# EAGLE board 8x8-LED-Matrix (EAGLE 5.11)
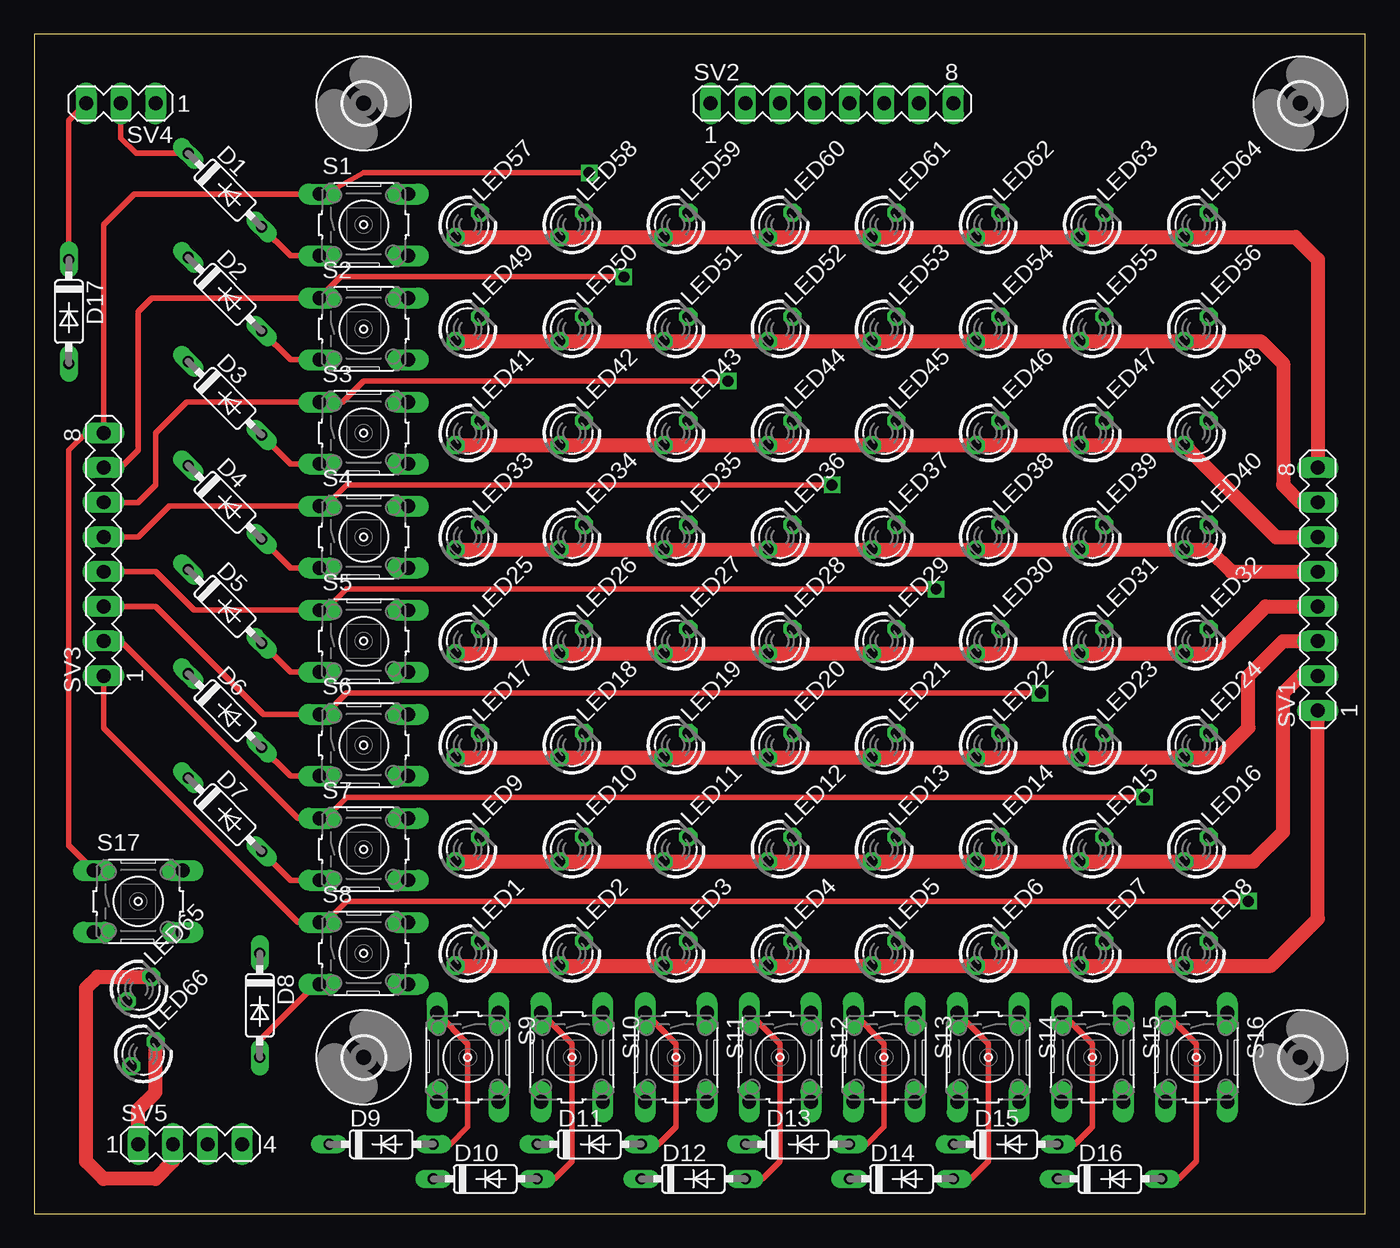
[diagram p0: board, top side]
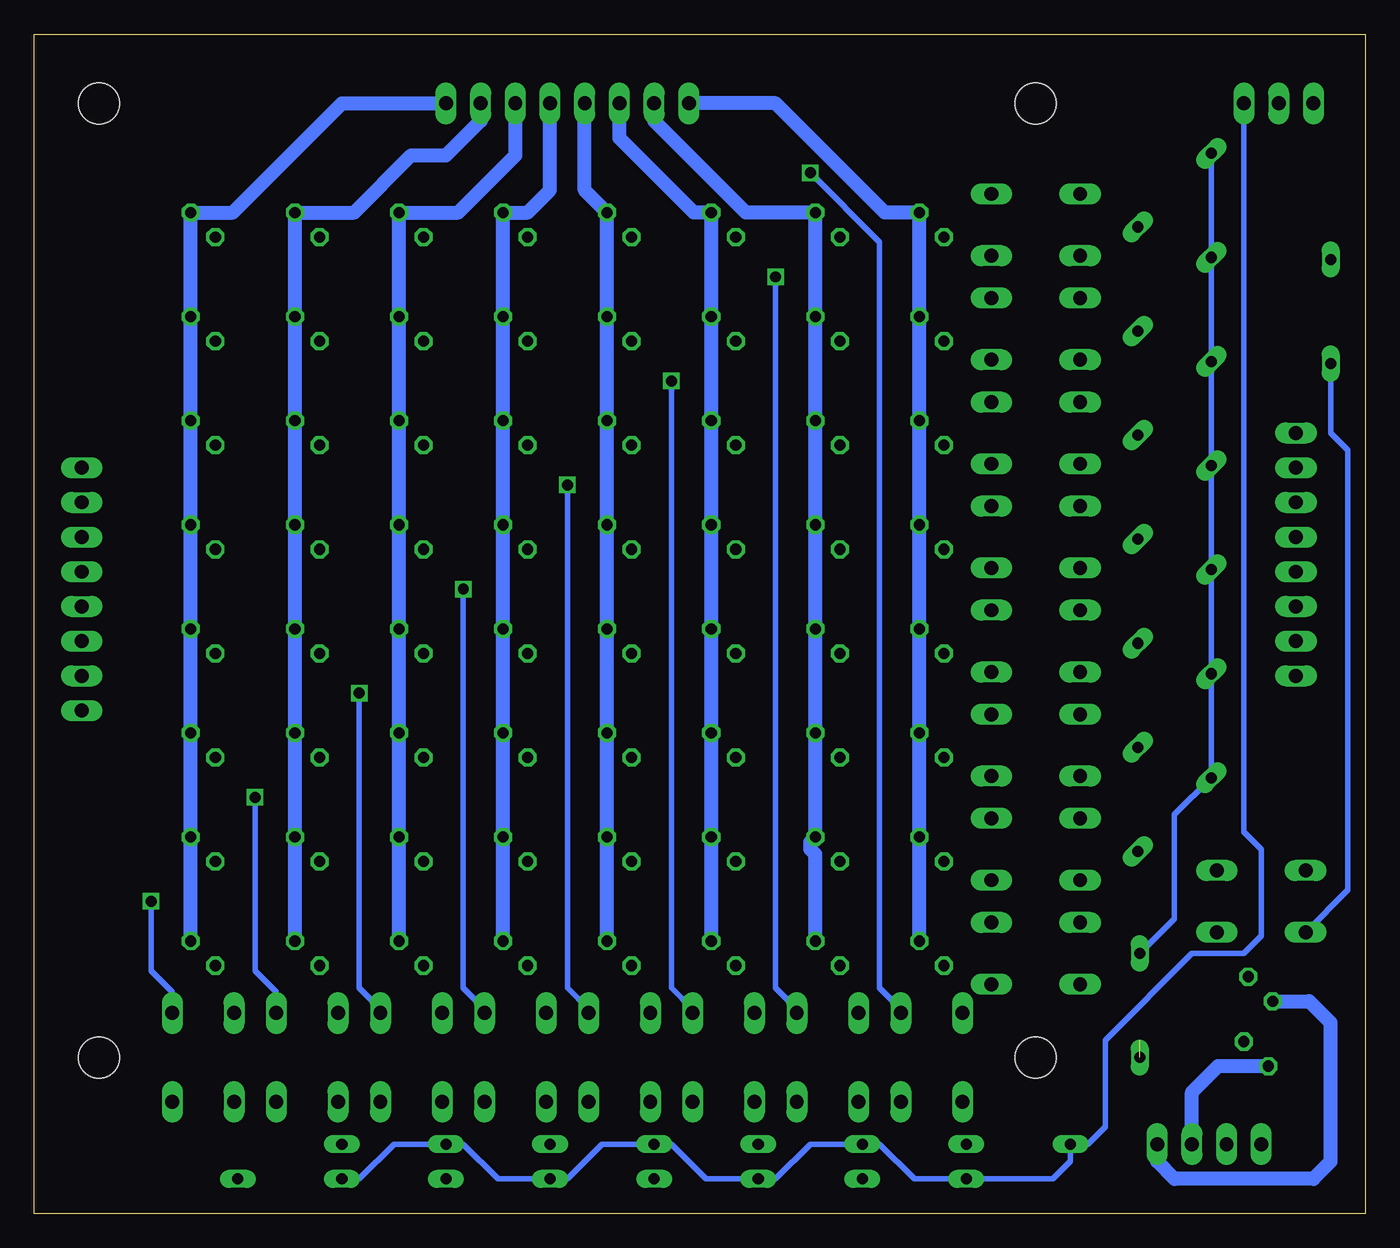
[diagram p1: board, bottom side, seen from below]

Size 97.46 x 86.35 mm. Coordinates in mm from the lower left corner, seen from the top.
Outline: 0,0 97.46,0 97.46,86.35 0,86.35 0,0
Copper layers (1*16): Top 0.035mm / dielectric 1.5mm / Bottom 0.035mm
Design rules "batchpcb": minimum track width 8mil, minimum drill 20mil, track to track 8mil, track to pad 8mil, pad to pad 8mil, via to via 8mil, smd to smd 8mil, copper to edge 40mil, drill to drill 8mil, minimum pad ring 10mil, minimum via ring 8mil, stop-mask expansion 4mil, vias tented up to drill 0mil, thermal gap 10mil

## Footprints (pad centres in the part's own frame; a part is rotated, then mirrored left to right if it is on the bottom)
DO35-7 = drill 0.813 long: A 3.81,0; C -3.81,0
LED3MM = drill 0.813 octagon: A -1.27,0; K 1.27,0
B3F-10XX = drill 1.016 long: 1 -3.251,2.261; 2 3.251,2.261; 3 -3.251,-2.261; 4 3.251,-2.261
MA08-1 = drill 1.016 long: 1 -8.89,0; 2 -6.35,0; 3 -3.81,0; 4 -1.27,0; 5 1.27,0; 6 3.81,0; 7 6.35,0; 8 8.89,0
MA03-1 = drill 1.016 long: 1 -2.54,0; 2 0,0; 3 2.54,0
MA04-1 = drill 1.016 long: 1 -3.81,0; 2 -1.27,0; 3 1.27,0; 4 3.81,0
3,0 = hole 3: 0,0

## Placement (x,y rotation side)
D1  1N4148DO35-7  [DO35-7]  13.97,74.93 315 top
D2  1N4148DO35-7  [DO35-7]  13.97,67.31 315 top
D3  1N4148DO35-7  [DO35-7]  13.97,59.69 315 top
D4  1N4148DO35-7  [DO35-7]  13.97,52.07 315 top
D5  1N4148DO35-7  [DO35-7]  13.97,44.45 315 top
D6  1N4148DO35-7  [DO35-7]  13.97,36.83 315 top
D7  1N4148DO35-7  [DO35-7]  13.97,29.21 315 top
D8  1N4148DO35-7  [DO35-7]  16.51,15.24 270 top
D9  1N4148DO35-7  [DO35-7]  25.4,5.08 0 top
D10  1N4148DO35-7  [DO35-7]  33.02,2.54 0 top
D11  1N4148DO35-7  [DO35-7]  40.64,5.08 0 top
D12  1N4148DO35-7  [DO35-7]  48.26,2.54 0 top
D13  1N4148DO35-7  [DO35-7]  55.88,5.08 0 top
D14  1N4148DO35-7  [DO35-7]  63.5,2.54 0 top
D15  1N4148DO35-7  [DO35-7]  71.12,5.08 0 top
D16  1N4148DO35-7  [DO35-7]  78.74,2.54 0 top
D17  1N4148DO35-7  [DO35-7]  2.54,66.04 270 top
LED1  TLLY4400  [LED3MM]  31.75,19.05 45 top
LED2  TLLY4400  [LED3MM]  39.37,19.05 45 top
LED3  TLLY4400  [LED3MM]  46.99,19.05 45 top
LED4  TLLY4400  [LED3MM]  54.61,19.05 45 top
LED5  TLLY4400  [LED3MM]  62.23,19.05 45 top
LED6  TLLY4400  [LED3MM]  69.85,19.05 45 top
LED7  TLLY4400  [LED3MM]  77.47,19.05 45 top
LED8  TLLY4400  [LED3MM]  85.09,19.05 45 top
LED9  TLLY4400  [LED3MM]  31.75,26.67 45 top
LED10  TLLY4400  [LED3MM]  39.37,26.67 45 top
LED11  TLLY4400  [LED3MM]  46.99,26.67 45 top
LED12  TLLY4400  [LED3MM]  54.61,26.67 45 top
LED13  TLLY4400  [LED3MM]  62.23,26.67 45 top
LED14  TLLY4400  [LED3MM]  69.85,26.67 45 top
LED15  TLLY4400  [LED3MM]  77.47,26.67 45 top
LED16  TLLY4400  [LED3MM]  85.09,26.67 45 top
LED17  TLLY4400  [LED3MM]  31.75,34.29 45 top
LED18  TLLY4400  [LED3MM]  39.37,34.29 45 top
LED19  TLLY4400  [LED3MM]  46.99,34.29 45 top
LED20  TLLY4400  [LED3MM]  54.61,34.29 45 top
LED21  TLLY4400  [LED3MM]  62.23,34.29 45 top
LED22  TLLY4400  [LED3MM]  69.85,34.29 45 top
LED23  TLLY4400  [LED3MM]  77.47,34.29 45 top
LED24  TLLY4400  [LED3MM]  85.09,34.29 45 top
LED25  TLLY4400  [LED3MM]  31.75,41.91 45 top
LED26  TLLY4400  [LED3MM]  39.37,41.91 45 top
LED27  TLLY4400  [LED3MM]  46.99,41.91 45 top
LED28  TLLY4400  [LED3MM]  54.61,41.91 45 top
LED29  TLLY4400  [LED3MM]  62.23,41.91 45 top
LED30  TLLY4400  [LED3MM]  69.85,41.91 45 top
LED31  TLLY4400  [LED3MM]  77.47,41.91 45 top
LED32  TLLY4400  [LED3MM]  85.09,41.91 45 top
LED33  TLLY4400  [LED3MM]  31.75,49.53 45 top
LED34  TLLY4400  [LED3MM]  39.37,49.53 45 top
LED35  TLLY4400  [LED3MM]  46.99,49.53 45 top
LED36  TLLY4400  [LED3MM]  54.61,49.53 45 top
LED37  TLLY4400  [LED3MM]  62.23,49.53 45 top
LED38  TLLY4400  [LED3MM]  69.85,49.53 45 top
LED39  TLLY4400  [LED3MM]  77.47,49.53 45 top
LED40  TLLY4400  [LED3MM]  85.09,49.53 45 top
LED41  TLLY4400  [LED3MM]  31.75,57.15 45 top
LED42  TLLY4400  [LED3MM]  39.37,57.15 45 top
LED43  TLLY4400  [LED3MM]  46.99,57.15 45 top
LED44  TLLY4400  [LED3MM]  54.61,57.15 45 top
LED45  TLLY4400  [LED3MM]  62.23,57.15 45 top
LED46  TLLY4400  [LED3MM]  69.85,57.15 45 top
LED47  TLLY4400  [LED3MM]  77.47,57.15 45 top
LED48  TLLY4400  [LED3MM]  85.09,57.15 45 top
LED49  TLLY4400  [LED3MM]  31.75,64.77 45 top
LED50  TLLY4400  [LED3MM]  39.37,64.77 45 top
LED51  TLLY4400  [LED3MM]  46.99,64.77 45 top
LED52  TLLY4400  [LED3MM]  54.61,64.77 45 top
LED53  TLLY4400  [LED3MM]  62.23,64.77 45 top
LED54  TLLY4400  [LED3MM]  69.85,64.77 45 top
LED55  TLLY4400  [LED3MM]  77.47,64.77 45 top
LED56  TLLY4400  [LED3MM]  85.09,64.77 45 top
LED57  TLLY4400  [LED3MM]  31.75,72.39 45 top
LED58  TLLY4400  [LED3MM]  39.37,72.39 45 top
LED59  TLLY4400  [LED3MM]  46.99,72.39 45 top
LED60  TLLY4400  [LED3MM]  54.61,72.39 45 top
LED61  TLLY4400  [LED3MM]  62.23,72.39 45 top
LED62  TLLY4400  [LED3MM]  69.85,72.39 45 top
LED63  TLLY4400  [LED3MM]  77.47,72.39 45 top
LED64  TLLY4400  [LED3MM]  85.09,72.39 45 top
LED65  TLLY4400  [LED3MM]  7.68,16.45 45 top
LED66  TLLY4400  [LED3MM]  7.99,11.69 45 top
S1  S1  [B3F-10XX]  24.13,72.39 0 top
S2  S2  [B3F-10XX]  24.13,64.77 0 top
S3  S3  [B3F-10XX]  24.13,57.15 0 top
S4  S4  [B3F-10XX]  24.13,49.53 0 top
S5  S5  [B3F-10XX]  24.13,41.91 0 top
S6  S6  [B3F-10XX]  24.13,34.29 0 top
S7  S7  [B3F-10XX]  24.13,26.67 0 top
S8  S8  [B3F-10XX]  24.13,19.05 0 top
S9  S9  [B3F-10XX]  31.75,11.43 270 top
S10  S10  [B3F-10XX]  39.37,11.43 270 top
S11  S11  [B3F-10XX]  46.99,11.43 270 top
S12  S12  [B3F-10XX]  54.61,11.43 270 top
S13  S13  [B3F-10XX]  62.23,11.43 270 top
S14  S14  [B3F-10XX]  69.85,11.43 270 top
S15  S15  [B3F-10XX]  77.47,11.43 270 top
S16  S16  [B3F-10XX]  85.09,11.43 270 top
S17  S17  [B3F-10XX]  7.62,22.86 0 top
SV1  J1  [MA08-1]  93.98,45.72 90 top
SV2  J2  [MA08-1]  58.42,81.28 0 top
SV3  J3  [MA08-1]  5.08,48.26 90 top
SV4  J4  [MA03-1]  6.35,81.28 180 top
SV5  J5  [MA04-1]  11.43,5.08 0 top
U$1  [3,0]  24.13,81.28 0 top
U$2  [3,0]  92.71,81.28 0 top
U$3  [3,0]  92.71,11.43 0 top
U$4  [3,0]  24.13,11.43 0 top

## Library data of the parts
D1-D17 = diode
LED1-LED66 = led; MF: VISHAY SEMICONDUCTOR; OC_FARNELL: 1612439
S1-S17 = switch-omron; MPN: B3F-1000; OC_FARNELL: 176432; OC_NEWARK: 36M3542
SV1-SV5 = con-lstb; OC_FARNELL: unknown; OC_NEWARK: unknown
U$1-U$4 = holes

## Nets
N$1: LED1.A LED2.A LED3.A LED4.A LED5.A LED6.A LED7.A LED8.A SV1.1
N$2: LED9.A LED10.A LED11.A LED12.A LED13.A LED14.A LED15.A LED16.A SV1.2
N$3: LED17.A LED18.A LED19.A LED20.A LED21.A LED22.A LED23.A LED24.A SV1.3
N$4: LED25.A LED26.A LED27.A LED28.A LED29.A LED30.A LED31.A LED32.A SV1.4
N$5: LED33.A LED34.A LED35.A LED36.A LED37.A LED38.A LED39.A LED40.A SV1.5
N$6: LED41.A LED42.A LED43.A LED44.A LED45.A LED46.A LED47.A LED48.A SV1.6
N$7: D3.A S3.3
N$8: LED57.A LED58.A LED59.A LED60.A LED61.A LED62.A LED63.A LED64.A SV1.8
N$9: LED1.K LED9.K LED17.K LED25.K LED33.K LED41.K LED49.K LED57.K SV2.1
N$10: LED2.K LED10.K LED18.K LED26.K LED34.K LED42.K LED50.K LED58.K SV2.2
N$11: LED3.K LED11.K LED19.K LED27.K LED35.K LED43.K LED51.K LED59.K SV2.3
N$12: LED4.K LED12.K LED20.K LED28.K LED36.K LED44.K LED52.K LED60.K SV2.4
N$13: LED5.K LED13.K LED21.K LED29.K LED37.K LED45.K LED53.K LED61.K SV2.5
N$14: LED6.K LED14.K LED22.K LED30.K LED38.K LED46.K LED54.K LED62.K SV2.6
N$15: LED7.K LED15.K LED23.K LED31.K LED39.K LED47.K LED55.K LED63.K SV2.7
N$16: LED8.K LED16.K LED24.K LED32.K LED40.K LED48.K LED56.K LED64.K SV2.8
N$17: LED49.A LED50.A LED51.A LED52.A LED53.A LED54.A LED55.A LED56.A SV1.7
N$18: S1.1 S9.1 S17.1 SV3.8
N$19: S2.1 S10.1 SV3.7
N$20: S4.1 S12.1 SV3.5
N$21: S5.1 S13.1 SV3.4
N$22: S6.1 S14.1 SV3.3
N$23: S7.1 S15.1 SV3.2
N$24: S8.1 S16.1 SV3.1
N$25: S3.1 S11.1 SV3.6
N$26: D4.A S4.3
N$27: D5.A S5.3
N$28: D6.A S6.3
N$29: D7.A S7.3
N$30: D8.A S8.3
N$31: D1.C D2.C D3.C D4.C D5.C D6.C D7.C D8.C SV4.2
N$32: D9.A S9.3
N$33: D10.A S10.3
N$34: LED65.A SV5.4
N$35: LED66.A SV5.3
N$36: LED65.K SV5.2
N$37: LED66.K SV5.1
N$38: D11.A S11.3
N$39: D12.A S12.3
N$40: D13.A S13.3
N$41: D14.A S14.3
N$42: D15.A S15.3
N$43: D16.A S16.3
N$44: D9.C D10.C D11.C D12.C D13.C D14.C D15.C D16.C SV4.1
N$45: D17.C SV4.3
N$46: D17.A S17.3
N$48: D1.A S1.3
N$49: D2.A S2.3

## Tracks (layer width: path | path; a pad name or v marks a point on that pad's centre or on a via)
N$1
  Top 1.016: LED1.A LED2.A LED3.A LED4.A LED5.A LED6.A LED7.A LED8.A 90.54,18.15 93.98,21.59 SV1.1
N$2
  Top 1.016: LED9.A LED10.A LED11.A LED12.A LED13.A LED14.A LED15.A LED16.A 89.27,25.77 91.44,27.94 91.44,38.1 92.71,39.37 SV1.2
N$3
  Top 1.016: LED17.A LED18.A LED19.A LED20.A LED21.A LED22.A LED23.A LED24.A 86.73,33.39 88.9,35.56 88.9,39.37 91.44,41.91 SV1.3
N$4
  Top 1.016: LED25.A LED26.A LED27.A LED28.A LED29.A LED30.A LED31.A LED32.A 86.73,41.01 90.17,44.45 SV1.4
N$5
  Top 1.016: LED33.A LED34.A LED35.A LED36.A LED37.A LED38.A LED39.A LED40.A 85.99,48.63 87.63,46.99 SV1.5
N$6
  Top 0.406: LED48.A 84.72,56.25
  Top 1.016: SV1.6 90.91,49.53 LED48.A LED47.A LED46.A LED45.A LED44.A LED43.A LED42.A LED41.A
N$7
  Top 0.406: S3.3 18.77,54.89 D3.A
N$8
  Top 1.016: LED57.A LED58.A LED59.A LED60.A LED61.A LED62.A LED63.A LED64.A 92.34,71.49 93.98,69.85 SV1.8
N$9
  Bottom 1.016: LED1.K LED9.K LED17.K LED25.K LED33.K LED41.K LED49.K LED57.K 35.19,73.29 43.18,81.28 SV2.1
N$10
  Bottom 1.016: LED2.K 40.27,26.3 40.64,26.67 40.64,27.2 LED10.K LED18.K LED26.K LED34.K LED42.K LED50.K LED58.K 45.35,73.29 52.07,80.01 SV2.2
N$11
  Bottom 1.016: LED3.K LED11.K LED19.K LED27.K LED35.K LED43.K LED51.K LED59.K 49.16,73.29 54.61,78.74 SV2.3
N$12
  Bottom 1.016: LED4.K LED12.K LED20.K LED28.K LED36.K LED44.K LED52.K LED60.K 57.15,74.93 SV2.4
N$13
  Bottom 1.016: LED5.K LED13.K LED21.K LED29.K LED37.K LED45.K LED53.K LED61.K 61.33,73.29 59.69,74.93 SV2.5
N$14
  Bottom 1.016: LED6.K LED14.K LED22.K LED30.K LED38.K LED46.K LED54.K LED62.K 66.41,73.29 62.23,77.47 SV2.6
N$15
  Bottom 1.016: LED7.K LED15.K LED23.K LED31.K LED39.K LED47.K LED55.K LED63.K 74.03,73.29 69.85,77.47 67.31,77.47 64.77,80.01 SV2.7
N$16
  Bottom 1.016: LED8.K LED16.K LED24.K LED32.K LED40.K LED48.K LED56.K LED64.K 82.92,73.29 74.93,81.28 SV2.8
N$17
  Top 1.016: LED49.A LED50.A LED51.A LED52.A LED53.A LED54.A LED55.A LED56.A 89.8,63.87 91.44,62.23 91.44,53.34 92.71,52.07 SV1.7
N$18  (via drill 0.8)
  Top 0.406: S17.1 2.54,26.95 2.54,55.88 3.81,57.15 SV3.8 5.08,72.39 7.34,74.65 S1.1 21.31,74.65 24.13,76.2 v40.64,76.2
  Bottom 0.406: S9.1 34.01,14.96 35.56,16.51 35.56,71.12 v40.64,76.2
N$19  (via drill 0.8)
  Top 0.406: v43.18,68.58 22.43,68.58 S2.1 8.61,67.03 7.62,66.04 7.62,55.88 6.35,54.61 SV3.7
  Bottom 0.406: S10.1 41.63,14.96 43.18,16.51 v43.18,68.58
N$20  (via drill 0.8)
  Top 0.406: v58.42,53.34 22.86,53.34 21.31,51.79 S4.1 9.88,51.79 7.62,49.53 SV3.5
  Bottom 0.406: S12.1 56.87,14.96 58.42,16.51 v58.42,53.34
N$21  (via drill 0.8)
  Top 0.406: v66.04,45.72 22.86,45.72 21.31,44.17 S5.1 11.71,44.17 8.89,46.99 SV3.4
  Bottom 0.406: S13.1 64.49,14.96 66.04,16.51 v66.04,45.72
N$22  (via drill 0.8)
  Top 0.406: v73.66,38.1 22.86,38.1 21.31,36.55 S6.1 16.79,36.55 8.89,44.45 SV3.3
  Bottom 0.406: S14.1 72.11,14.96 73.66,16.51 v73.66,38.1
N$23  (via drill 0.8)
  Top 0.406: v81.28,30.48 22.86,30.48 21.31,28.93 S7.1 19.33,28.93 6.35,41.91 SV3.2
  Bottom 0.406: S15.1 79.73,16.23 81.28,17.78 v81.28,30.48
N$24  (via drill 0.8)
  Top 0.406: v88.9,22.86 22.86,22.86 21.31,21.31 S8.1 19.33,21.31 5.08,35.56 SV3.1
  Bottom 0.406: S16.1 87.35,16.23 88.9,17.78 v88.9,22.86
N$25  (via drill 0.8)
  Top 0.406: v50.8,60.96 24.13,60.96 22.58,59.41 S3.1 11.15,59.41 8.89,57.15 8.89,53.34 7.62,52.07 SV3.6
  Bottom 0.406: S11.1 49.25,14.96 50.8,16.51 v50.8,60.96
N$26
  Top 0.406: S4.3 18.77,47.27 D4.A
N$27
  Top 0.406: S5.3 18.77,39.65 D5.A
N$28
  Top 0.406: S6.3 18.77,32.03 D6.A
N$29
  Top 0.406: S7.3 18.77,24.41 D7.A
N$30  (1 unrouted)
  Top 0.406: S8.3 20.6,16.79 16.51,12.7
N$31
  Top 0.406: D1.C 7.47,77.62 6.35,78.74 SV4.2
  Bottom 0.406: D8.C 13.97,21.59 13.97,29.21 D7.C D6.C D5.C D4.C D3.C D2.C D1.C
N$32
  Top 0.406: D9.A 30.48,5.08 31.75,6.35 31.75,12.42 S9.3
N$33
  Top 0.406: D10.A 38.1,2.54 39.37,3.81 39.37,12.42 S10.3
N$34
  Bottom 1.016: SV5.4 15.24,3.81 13.97,2.54 3.81,2.54 2.54,3.81 2.54,13.97 4.12,15.55 LED65.A
N$35
  Bottom 1.016: SV5.3 12.7,8.89 10.79,10.79 LED66.A
N$36
  Top 1.016: LED65.K 4.64,17.34 3.81,16.51 3.81,3.81 5.08,2.54 8.89,2.54 10.16,3.81 SV5.2
N$37
  Top 1.016: SV5.1 7.62,7.62 8.89,8.89 LED66.K | 8.89,12.7 LED66.K | LED66.K
N$38
  Top 0.406: D11.A 45.72,5.08 46.99,6.35 46.99,12.42 S11.3
N$39
  Top 0.406: D12.A 53.34,2.54 54.61,3.81 54.61,12.42 S12.3
N$40
  Top 0.406: D13.A 60.96,5.08 62.23,6.35 62.23,12.42 S13.3
N$41
  Top 0.406: D14.A 68.58,2.54 69.85,3.81 69.85,12.42 S14.3
N$42
  Top 0.406: D15.A 76.2,5.08 77.47,6.35 77.47,12.42 S15.3
N$43
  Top 0.406: D16.A 83.82,2.54 85.09,3.81 85.09,12.42 S16.3
N$44
  Bottom 0.406: D16.C 73.66,2.54 71.12,5.08 D15.C 66.04,5.08 63.5,2.54 D14.C 58.42,2.54 55.88,5.08 D13.C 50.8,5.08 48.26,2.54 D12.C 43.18,2.54 40.64,5.08 D11.C 35.56,5.08 33.02,2.54 D10.C 22.86,2.54 21.59,3.81 D9.C 20.32,5.08 19.05,6.35 19.05,12.7 12.7,19.05 8.89,19.05 7.62,20.32 7.62,26.67 8.89,27.94 SV4.1
N$45
  Top 0.406: D17.C 2.54,80.01 SV4.3
N$46
  Bottom 0.406: D17.A 2.54,57.15 1.27,55.88 1.27,23.7 S17.3
N$48
  Top 0.406: S1.3 18.77,70.13 D1.A
N$49
  Top 0.406: S2.3 18.77,62.51 D2.A